# Altium PCB Capstone PCB.PcbDoc
Units mil, origin at the board's own origin, x right, y up, seen from the top; angles counter-clockwise.
Board outline 6965 x 4935 mil, 4 copper layers (Top Layer, AGND, PGND, Bottom Layer), stack 26.468 mil thick; 52 components, 33 nets, 164 pads, 57 vias.
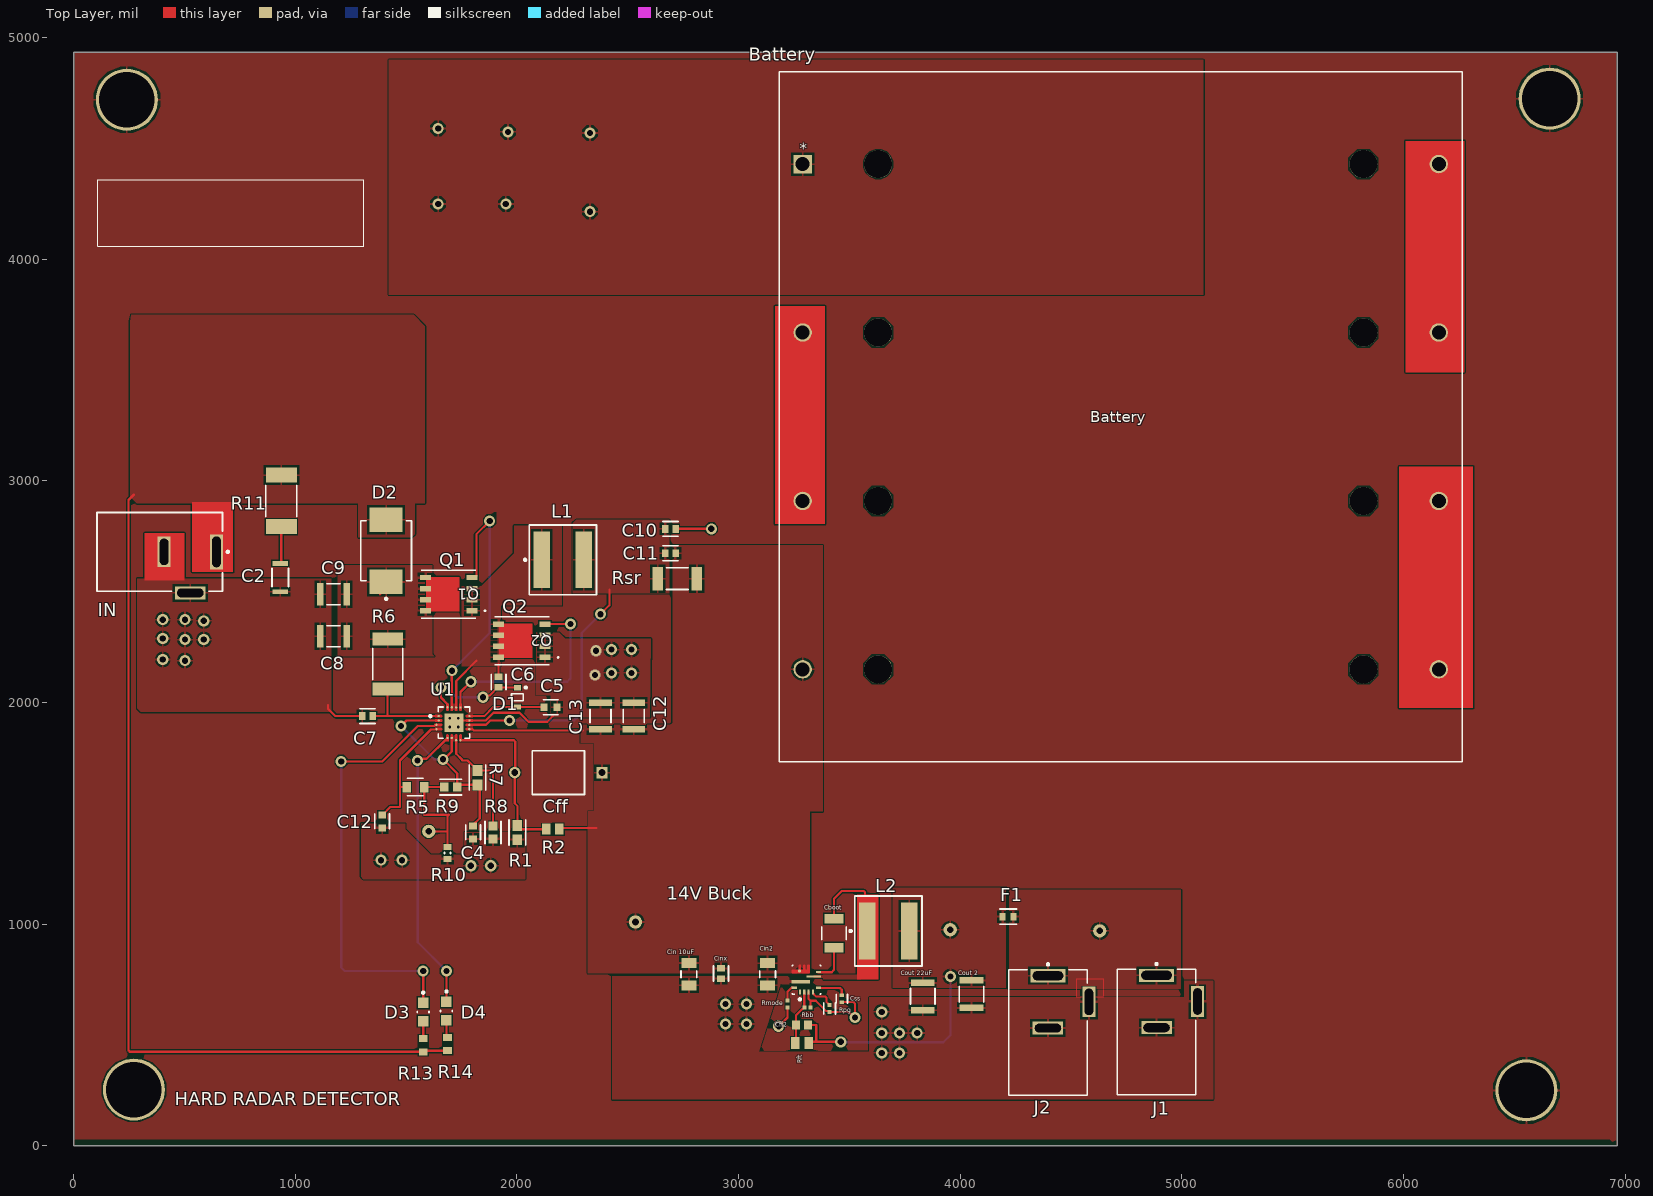
[diagram p0: Top Layer view]
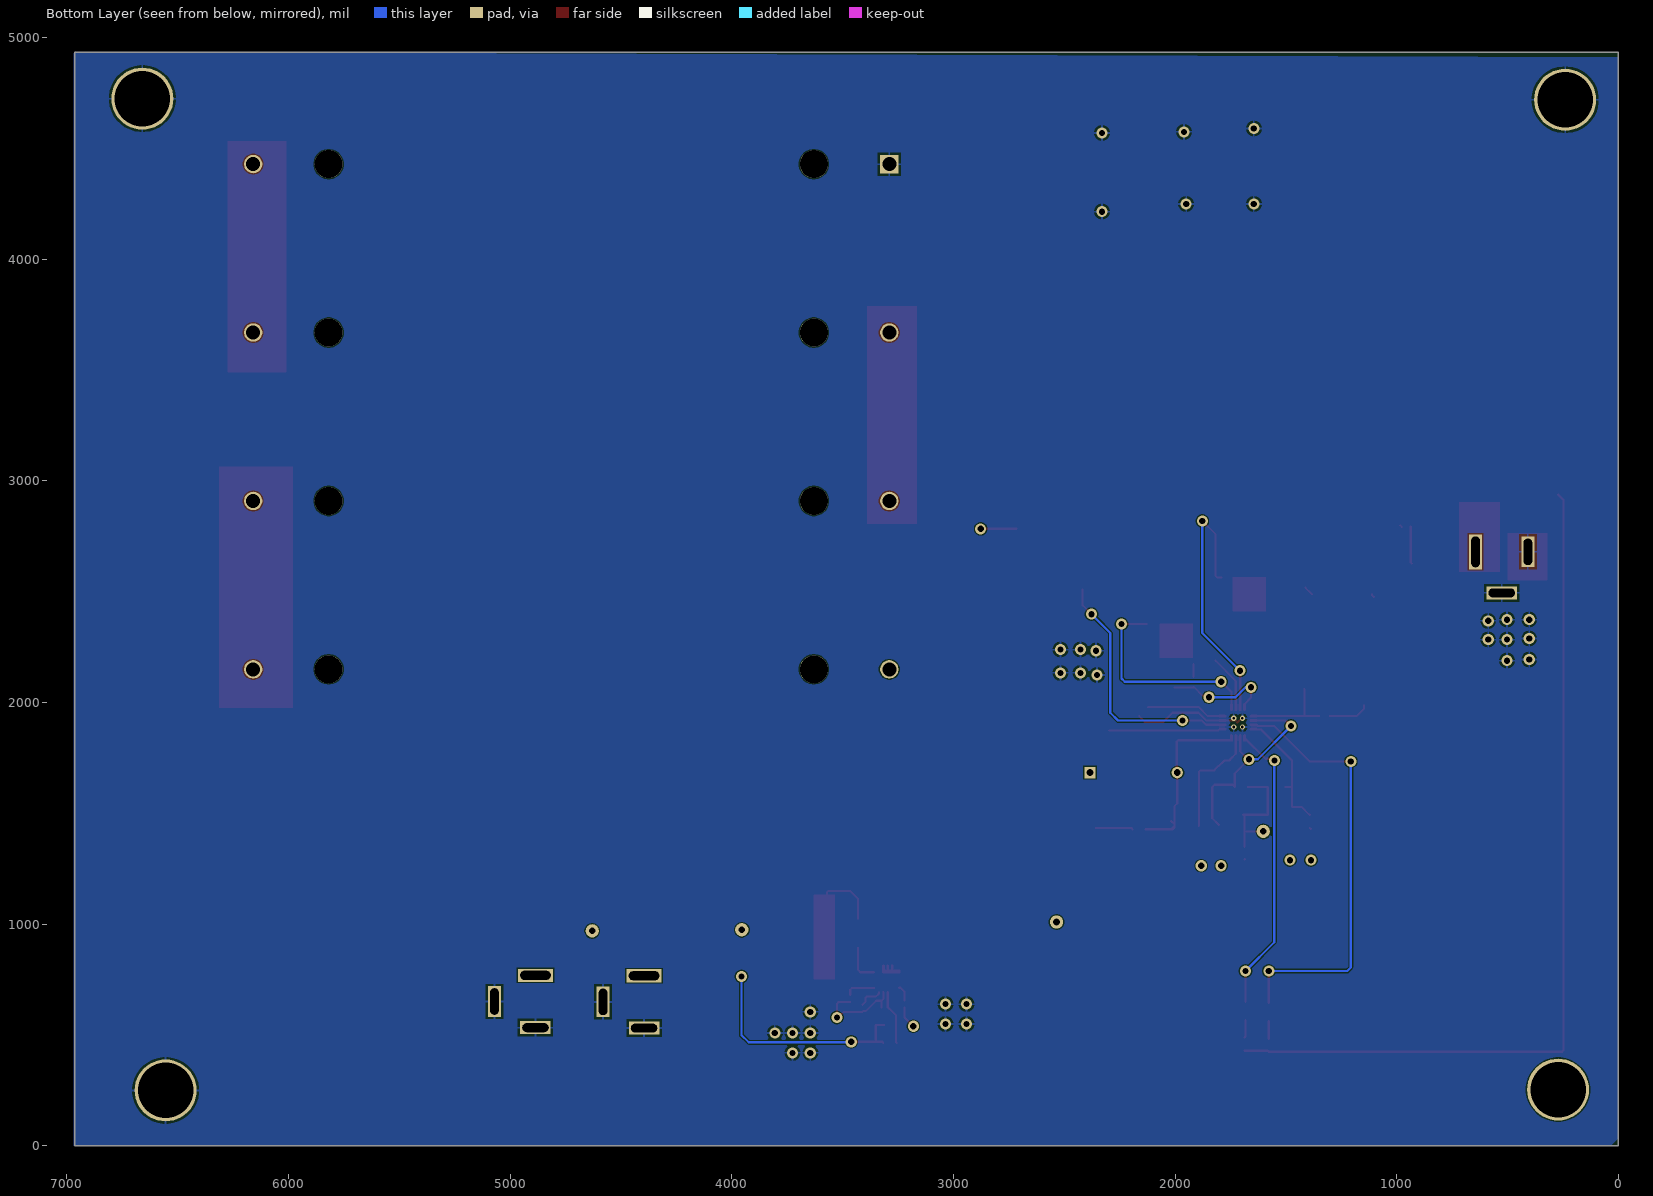
[diagram p1: Bottom Layer view, seen from below]
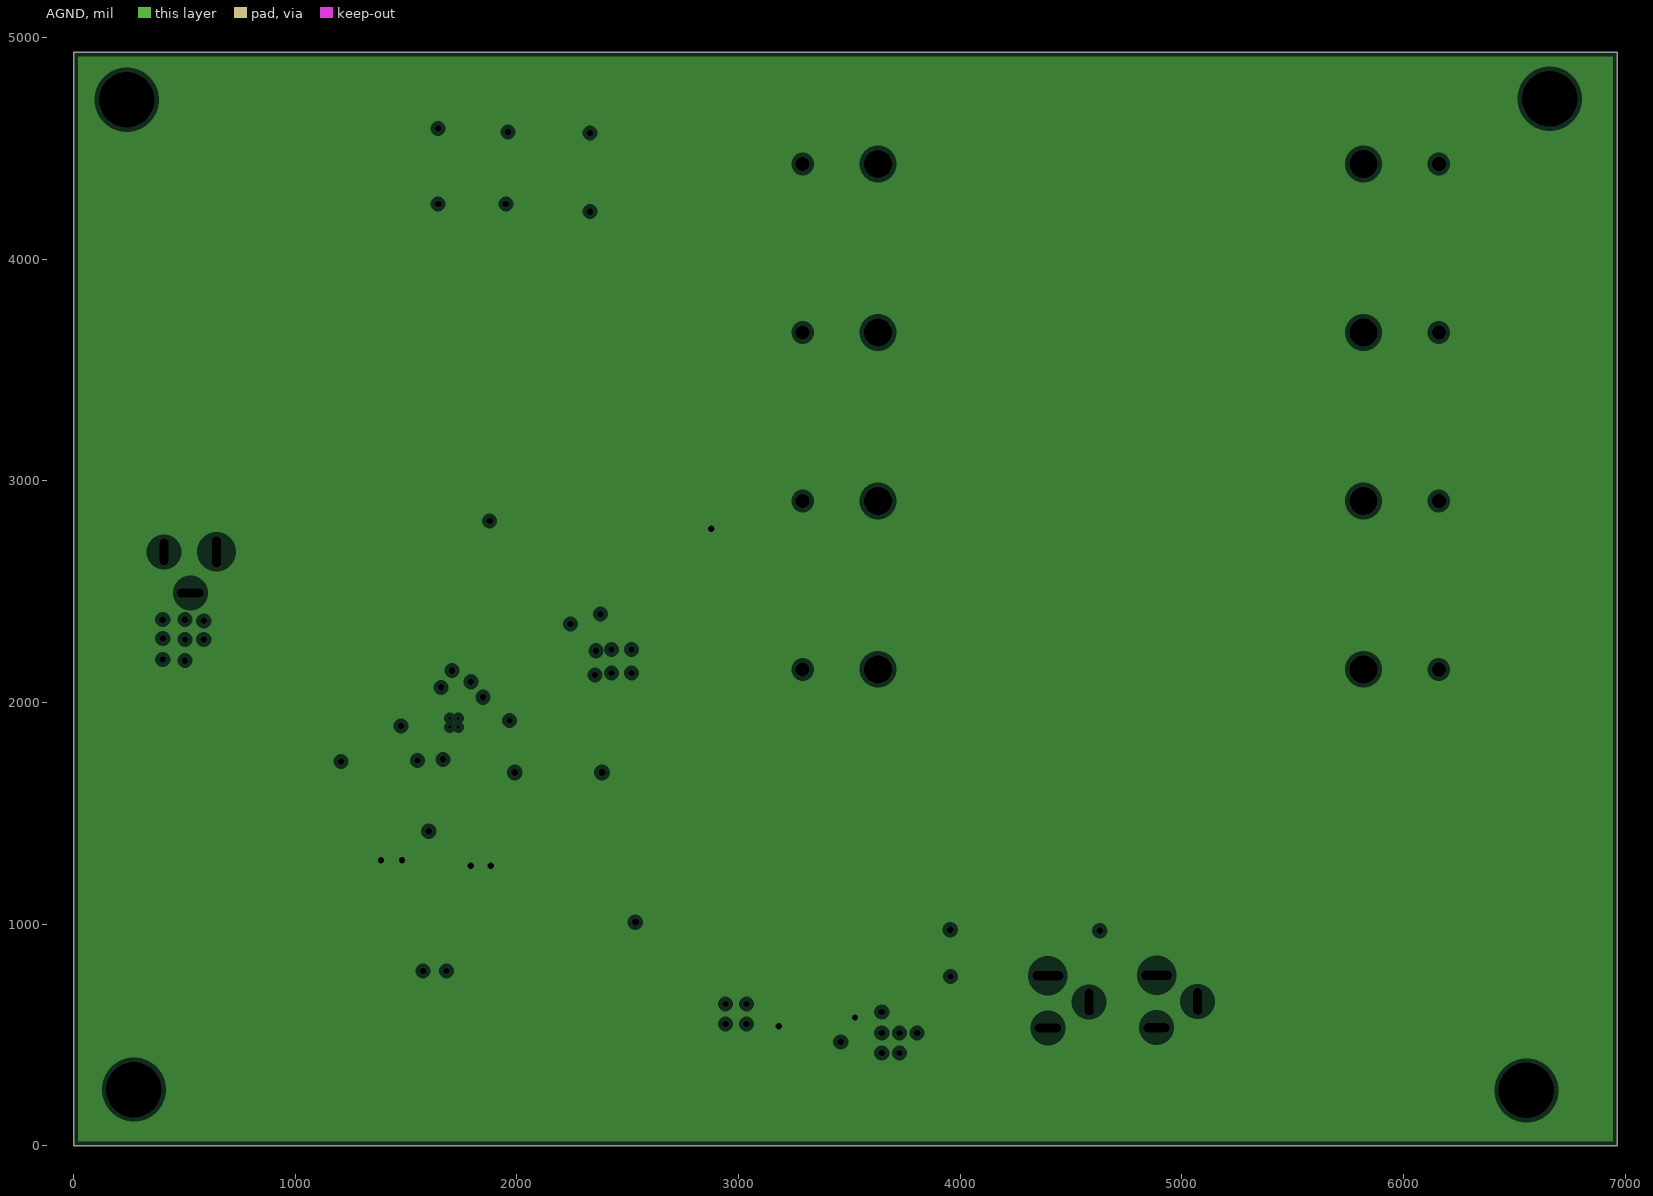
[diagram p2: AGND, clearances drawn from the general rule]
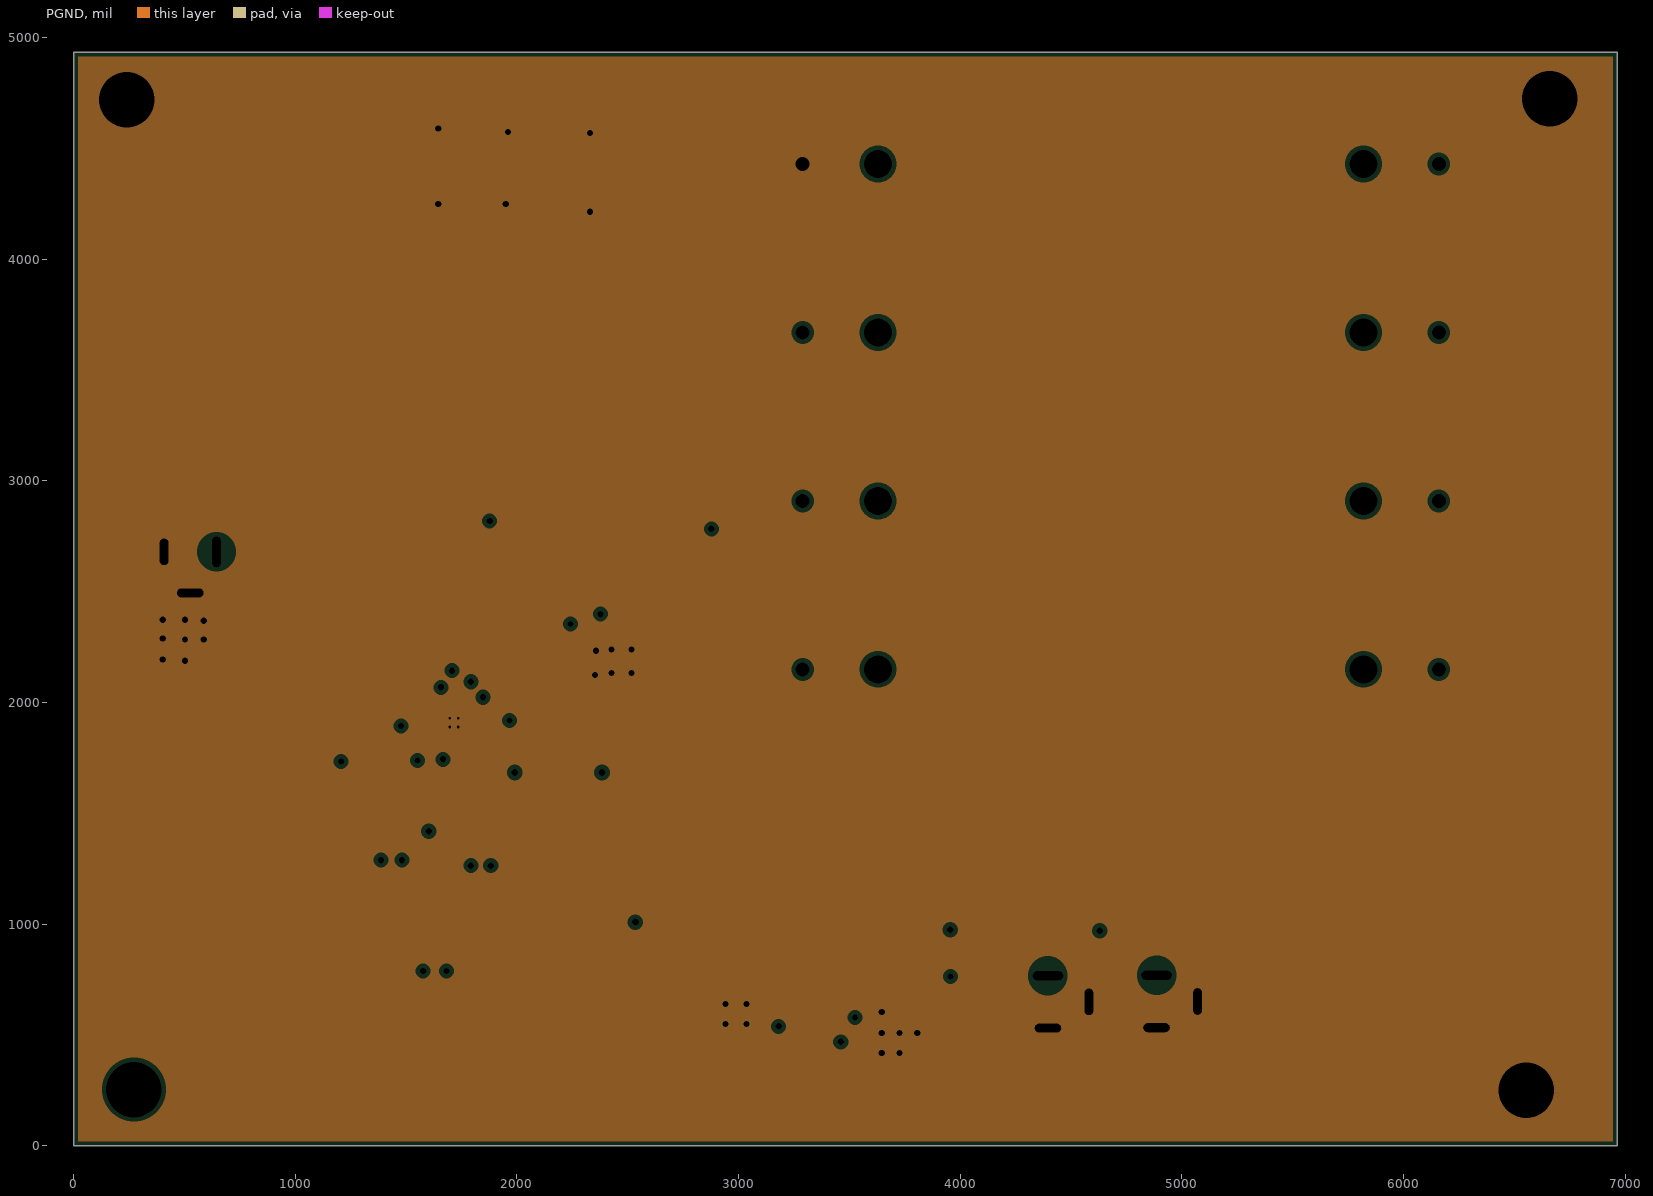
[diagram p3: PGND, clearances drawn from the general rule]
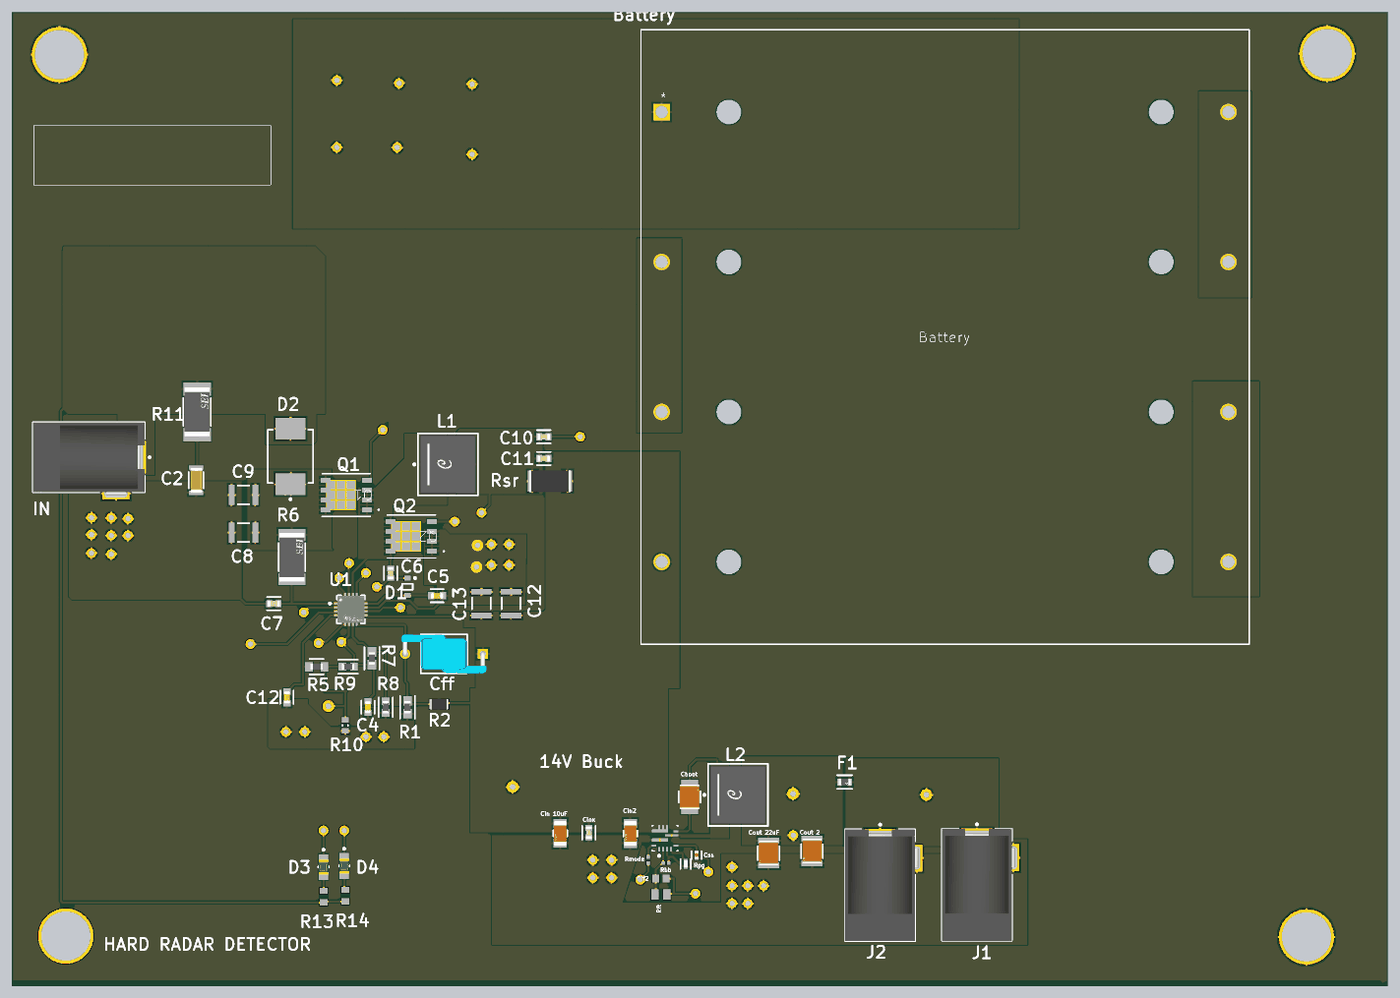
[diagram p4: 3D render of the assembled board from above, using the file's embedded part models]

## Layer stack, top to bottom
Top Solder: solder mask 0.4, Solder Resist, Dk 3.5
Top Layer: signal copper 2.7559
Dielectric 2: prepreg 2.8, PP-006, Dk 4.1
AGND: plane copper 1.378, net SGND
Dielectric 1: dielectric 12.6, FR-4, Dk 4.8
PGND: plane copper 1.378, net GND
Dielectric 3: prepreg 2.8, PP-006, Dk 4.1
Bottom Layer: signal copper 2.7559
Bottom Solder: solder mask 0.4, Solder Resist, Dk 3.5

## Board outline
0,0 0,4935 6965,4935 6965,0

## Design rules (kind name [scope] priority, off if disabled: settings)
Clearance Clearance_2 [All] p1: gap=5 ignorepadtopadclearanceinfootprint=FALSE
Clearance [All] p2: gap=10 ignorepadtopadclearanceinfootprint=FALSE
HoleSize [All] p1: absolutevalues=TRUE maxlimit=200 minlimit=1 maxpercent=80.000 minpercent=20.000
MinimumSolderMaskSliver [All] p1: minsoldermaskwidth=1
PlaneClearance [All] p1: clearance=20
PlaneConnect [All] p1: planeconnectstyle=Relief reliefexpansion=20 reliefentries=4 reliefconductorwidth=10 reliefairgap=10
PolygonConnect [All] p1: connectstyle=Relief reliefconductorwidth=10 reliefentries=4 polygonreliefangle="90 Angle" airgapwidth=10
RoutingVias [All] p1: holewidth=28 width=50 viastyle="Through Hole" minholewidth=28 minwidth=50 maxholewidth=28 maxwidth=50
SilkToSilkClearance [All] p1: silktosilkclearance=1
SilkToSolderMaskClearance [IsPad] p1: minsilkscreentomaskgap=1 clearancetoexposedcopper=TRUE
SolderMaskExpansion [All] p1: expansion=4 istentingtop=FALSE
SupplyNets "Schematic Supply Nets_1" [InNet('SGND')] p1: voltage=0.000
SupplyNets "Schematic Supply Nets" [InNet('GND')] p2: voltage=0.000
Width [All] p1: maxlimit=10 minlimit=1 preferedwidth=10 minimp=50.000000 maximp=50.000000 favimp=50.000000
24 further rules are at their usual default settings.

## Components (designator, comment, footprint, x,y, rotation, side; value= is the part's Value field where it differs from the comment)
"14V Buck" "Comment" RPA0010A-MFG 3306.33,749.62 r90 top
Battery "BK-18650-PC8" BK-18650-PC8_MPD 3289.65,4429.53 r0 top
C2 "CGA5L3X7R1H225K160AB" FP-CGA5L-0_3-0_1-IPC_C 932.29,2564.02 r270 top
C4 "CC0603KRX7R8BB105" FP-CC0603-DA-MFG 1802.29,1414.49 r270 top value="1 uF"
C5 "CC0603KRX7R8BB105" FP-CC0603-DA-MFG 2152.29,1979.02 r0 top value="1 uF"
C6 "C0603C104K4RAC7411" FP-C0603C-CF-MFG 1917.29,2092.64 r90 top value="0.10 μF"
C7 "C0603C104K4RAC7411" FP-C0603C-CF-MFG 1325.91,1939.02 r180 top value="0.10 μF"
C8 "GRM32ER7YA106KA12L" CAPC3225X270X30LL30 1172.29,2299.02 r0 top
C9 "GRM32ER7YA106KA12L" CAPC3225X270X30LL30 1172.29,2489.02 r0 top
C10 "C0603C104K5RACTU" FP-C0603C-CF-MFG 2692.29,2784.02 r180 top value="0.10 μF"
C11 "C0603C104K4RAC7411" FP-C0603C-CF-MFG 2692.29,2674.02 r0 top value="0.10 μF"
C12 "CC0603KRX7R8BB104" FP-CC0603-DA-MFG 1392.29,1464.02 r90 top value="100 nF"
C12 "GRM32ER7YA106KA12L" CAPC3225X270X30LL30 2527.29,1939.02 r90 top
C13 "GRM32ER7YA106KA12L" CAPC3225X270X30LL30 2377.29,1939.02 r90 top
Cboot "C3225X6S1C226M250AC" FP-C3225-250-0_4-MFG 3431.17,959.55 r90 top
Cff "DE11XRB220KN4AR01F" FP-DE1_D6_T5_F10_d0_6-0_0-MFG 2187.29,1684.02 r180 top
Cff2 "C0603C151K3GACTU" CAPC1608X87X35NL15T15 3286.23,545.6 r0 top
Cin2 "Comment" FP-GRM31C-0_2-e0_3_0_8-IPC_C 3131.17,774.28 r270 top
"Cin 10uF" "Comment" FP-GRM31C-0_2-e0_3_0_8-IPC_C 2776.17,774.51 r270 top
Cinx "C0603C104M3VACTU" FP-C0603C-CF-MFG 2921.17,778.13 r270 top value="0.10 μF"
"Cout 2" "Cin" FP-C3225-250-0_4-IPC_C 4051.17,684.51 r270 top
"Cout 22uF" "Cin" FP-C3225-250-0_4-IPC_C 3831.17,674.51 r270 top
Css "GRM155R71C223KA01D" FP-GRM155-0_05-MFG 3466.17,664.51 r270 top
D1 "BAT54HT1G" ONSC-SOD-323-2-477-02_V 2002.29,2024.02 r270 top
D2 "MBRS540T3G" ONSC-SMC-2-403-03_V 1410,2685 r90 top
D3 "LTST-C170GKT" FP-LTST-C170GKT-MFG 1577.29,604.02 r270 top
D4 "LTST-C170GKT" FP-LTST-C170GKT-MFG 1682.29,609.02 r270 top
F1 "FEMTOASMDC005F-2" FP-MCT0603-IPC_C 4216.17,1034.51 r0 top
IN "PJ-002A" CUI-PJ-002A_V 526.48,2680.04 r180 top
J1 "PJ-002A" CUI-PJ-002A_V 4886.17,651.4 r270 top
J2 "PJ-002A" CUI-PJ-002A_V 4396.17,649.51 r270 top
L1 "XAL7070-222" FP-XAL7070-MFG 2207.29,2644.02 r0 top (schematic designator L?)
L2 "XAL7070-332" FP-XAL7070-MFG 3676.05,969.51 r0 top
Q1 "SIR426DP-T1-GE3" POWERPAK_SO-8_SINGLE 1692.29,2489.02 r180 top
Q2 "SIR426DP-T1-GE3" POWERPAK_SO-8_SINGLE 2022.29,2279.02 r180 top
R1 "RR0816P-104-D" FP-RR0816-IPC_A 2002.29,1413.72 r90 top
R2 "ERA-6AEB6983V" RESC2013X60X40LL20T25_A 2162.29,1429.02 r0 top
R5 "RR0816P-101-D" FP-RR0816-MFG 1542.29,1619.02 r180 top
R6 "RMCF2512JT10R0" FP-RMCF2512-IPC_B 1417.29,2174.02 r90 top
R7 "RR0816P-104-D" FP-RR0816-IPC_A 1822.29,1661.51 r270 top
R8 "ERA-3AEB4122V" FP-ERA3A-IPC_B 1892.29,1414.02 r90 top
R9 "ERA-3AEB9311V" FP-ERA3A-IPC_B 1701.83,1619.02 r180 top
R10 "442K 1% 0603(1608)" RESC0603(1608)_L 1687.29,1321.58 r90 top value="442000.00 Ohm"
R11 "RMCF2512JT2R00" FP-RMCF2512-IPC_A 937.29,2910.2 r90 top
R13 "RC0603JR-0710KL" RESC1608X55X25ML10T15 1577.29,454.02 r90 top
R14 "RC0603JR-0710KL" RESC1608X55X25ML10T15 1687.29,459.02 r90 top
Rbb "10K 1% 0201(0603)" RESC0201(0603)_N 3311.17,624.51 r180 top value="100000.00 Ohm"
Rft "ERJ-6ENF7322V" RESC2013X70X40LL20T20 3286.17,464.51 r0 top
Rmode "CRCW040252K3FKED" RESC1005X40X25LL05T05 3221.17,639.51 r90 top
Rpg "CRCW0402100KFKED" FP-CRCW0402-e3-IPC_C 3411.17,619.51 r270 top
Rsr "WSL2010R0100FEA" RESC5125X89X51LL25T25 2723.71,2559.02 r0 top
U1 "BQ24600RVAT" FP-RVA0016A-MFG 1716.19,1909.49 r0 top

## Footprints (in the part's own frame and the unit in brackets; to place one, negate y for a bottom-side part, rotate by r counter-clockwise, add the part's x,y. Pads: shape width x height; smd on the part's side, far side on the other; paste and mask are expansions set on the pad)
BK-18650-PC8_MPD [mil]
  rect 83x83 hole 63 paste-99999 mask+0: 1(0,0)
  round 83 hole 63 paste-99999 mask+0: 2(0,-759.84) 3(0,-1519.68) 4(0,-2279.53) 5(2870.08,-2279.53) 6(2870.08,-1519.69) 7(2870.08,-759.84) 8(2870.08,0)
  round 126 hole 126 unplated paste-99999 mask+0: 9(340.35,0) 10(340.35,-759.84) 11(340.35,-1519.68) 12(340.35,-2279.53) 13(2529.72,-2279.53) 14(2529.72,-1519.69) 15(2529.72,-759.84) 16(2529.72,0)
  silkscreen extent -105,-2697 2975,417
CAPC1608X87X35NL15T15 [mm] "Chip Capacitor, 2-Leads, Body 1.60x0.80mm, IPC Medium Density"
  rect 0.9x1 smd: 1(-0.675,0) 2(0.675,0)
  body extent -0.87,-0.48 0.87,0.47, height 0.87
CAPC3225X270X30LL30 [mm] "Chip Capacitor, 2-Leads, Body 3.5x2.7mm, IPC High Density"
  rect 0.75x2.6 smd: 1(-1.525,0) 2(1.525,0)
  silkscreen extent -0.75,-1.2 0.75,1.2, body extent -1.75,-1.35 1.75,1.35, height 2.7
CUI-PJ-002A_V [mm] "THD, 3-Leads, Body 14.4x9mm, Height 11mm"
  rect 1.5x4 hole 1 slot 3.5 at 90 deg: 1(-3,0)
  rect 1.5x3.5 hole 1 slot 3 at 90 deg: 2(3,0)
  rect 3.5x1.5 hole 1 slot 3 at 0 deg: 3(0,4.7)
  silkscreen extent -4.43,-4.5 10.7,4.5, body extent -3.7,-4.5 10.7,4.9, height 11
FP-C0603C-CF-MFG [mm]
  rect 0.75x0.9 smd paste+0 mask+0: 1(-0.6,0) 2(0.6,0)
  silkscreen extent -0.87,-0.85 0.88,0.85, body extent -1.2,-0.6 1.2,0.6, height 0.25
FP-C3225-250-0_4-IPC_C [mm]
  rect 0.753x2.704 smd paste+0 mask+0: 1(-1.575,0) 2(1.575,0)
  silkscreen extent -0.9,-1.4 0.9,1.4, body extent -2.05,-1.5 2.05,1.5, height 0.25
FP-C3225-250-0_4-MFG [mm]
  rect 1.1x2.2 smd paste+0 mask+0: 1(-1.65,0) 2(1.65,0)
  silkscreen extent -0.72,-1.4 0.72,1.4, body extent -2.3,-1.5 2.3,1.5, height 0.25
FP-CC0603-DA-MFG [mm]
  rect 0.8x0.9 smd paste+0 mask+0: 1(-0.75,0) 2(0.75,0)
  silkscreen extent -0.85,-0.85 0.85,0.85, body extent -1.35,-0.75 1.35,0.75, height 0.25
FP-CGA5L-0_3-0_1-IPC_C [mm]
  rect 0.556x1.806 smd paste+0 mask+0: 1(-1.625,0) 2(1.625,0)
  silkscreen extent -1.05,-0.95 1.05,0.95, body extent -2,-1.05 2,1.05, height 0.25
FP-CRCW0402-e3-IPC_C [mil]
  rect 18.43x18.6 smd paste+0 mask+0: 1(-15.83,0) 2(15.83,0)
  silkscreen extent -25,-27 25,27, body extent -29,-15 29,15, height 10
FP-DE1_D6_T5_F10_d0_6-0_0-MFG [mm]
  rect 1.3x1.3 hole 0.8 paste-2539.97 mask+0: 1(-5,0)
  round 1.3 hole 0.8 paste-2539.97 mask+0: 2(5,0)
  silkscreen extent -3,-2.5 3,2.5, body extent -5.75,-2.6 5.75,2.6, height 0.25
FP-ERA3A-IPC_B [mil]
  rect 39.58x39.61 smd paste+0 mask+0: 1(-29.55,0) 2(29.55,0)
  silkscreen extent -49,-36 49,36, body extent -59,-30 59,30, height 10
FP-GRM31C-0_2-e0_3_0_8-IPC_C [mil]
  rect 45.46x67.17 smd paste+0 mask+0: 1(-50.23,0) 2(50.23,0)
  silkscreen extent -16,-35 16,35, body extent -77,-39 77,39, height 10
FP-GRM155-0_05-MFG [mm]
  rect 0.4x0.5 smd paste+0 mask+0: 1(-0.4,0) 2(0.4,0)
  silkscreen extent -0.5,-0.65 0.5,0.65, body extent -0.7,-0.38 0.7,0.38, height 0.25
FP-LTST-C170GKT-MFG [mm]
  rect 1.2x1.2 smd paste+0 mask+0: 1(-1.05,0) 2(1.05,0)
  silkscreen extent -2.35,-0.67 0.08,0.67, body extent -1.75,-0.77 1.75,0.77, height 0.25
FP-MCT0603-IPC_C [mil]
  rect 26.13x33.94 smd paste+0 mask+0: 1(-24.78,0) 2(24.78,0)
  silkscreen extent -38,-34 38,34, body extent -42,-23 42,23, height 10
FP-RMCF2512-IPC_A [mil]
  rect 67.1x139.96 smd paste+0 mask+0: 1(-116.18,0) 2(116.18,0)
  silkscreen extent -71,-70 71,70, body extent -169,-90 169,90, height 10
FP-RMCF2512-IPC_B [mil]
  rect 59.22x136.02 smd paste+0 mask+0: 1(-112.24,0) 2(112.24,0)
  silkscreen extent -71,-68 71,68, body extent -152,-78 152,78, height 10
FP-RR0816-IPC_A [mil]
  rect 49.41x43.55 smd paste+0 mask+0: 1(-32.51,0) 2(32.51,0)
  silkscreen extent -57,-38 57,38, body extent -77,-41 77,41, height 10
FP-RR0816-MFG [mm]
  rect 1x1.2 smd paste+0 mask+0: 1(-1,0) 2(1,0)
  silkscreen extent -0.9,-1 0.9,1, body extent -1.6,-0.7 1.6,0.7, height 0.25
FP-RVA0016A-MFG [mm]
  round 0.252 smd paste-1000 mask+0: 1(-1.75,0.75) 2(-1.75,0.25) 3(-2.01,-0.25) 4(-2.01,-0.75) 5(-0.75,-1.75) 6(-0.25,-1.75) 7(0.25,-2.01) 8(0.75,-2.01) 9(1.75,-0.75) 10(1.75,-0.25) 11(1.764,0.25) 12(1.764,0.75) 13(0.75,1.75) 14(0.25,1.75) 15(-0.25,1.764) 16(-0.75,1.764)
  rect 2.14x2.14 smd paste-1000 mask+0: 17(0,0)
  Top Layer region: 2.15,0.11 1.49,0.11 1.436,0.121 1.391,0.151 1.361,0.196 1.35,0.25 1.35,0.25 1.361,0.304 1.391,0.349 1.436,0.379 1.49,0.39 1.49,0.39 2.15,0.39
  Top Layer region: 2.15,-0.89 1.49,-0.89 1.436,-0.879 1.391,-0.849 1.361,-0.804 1.35,-0.75 1.35,-0.75 1.361,-0.696 1.391,-0.651 1.436,-0.621 1.49,-0.61 1.49,-0.61 2.15,-0.61
  Top Layer region: -2.15,0.89 -1.49,0.89 -1.436,0.879 -1.391,0.849 -1.361,0.804 -1.35,0.75 -1.35,0.75 -1.361,0.696 -1.391,0.651 -1.436,0.621 -1.49,0.61 -1.49,0.61 -2.15,0.61
  Top Layer region: -2.15,0.39 -1.49,0.39 -1.436,0.379 -1.391,0.349 -1.361,0.304 -1.35,0.25 -1.35,0.25 -1.361,0.196 -1.391,0.151 -1.436,0.121 -1.49,0.11 -1.49,0.11 -2.15,0.11
  Top Layer region: -2.15,-0.11 -1.49,-0.11 -1.436,-0.121 -1.391,-0.151 -1.361,-0.196 -1.35,-0.25 -1.35,-0.25 -1.361,-0.304 -1.391,-0.349 -1.436,-0.379 -1.49,-0.39 -1.49,-0.39 -2.15,-0.39
  Top Layer region: -2.15,-0.61 -1.49,-0.61 -1.436,-0.621 -1.391,-0.651 -1.361,-0.696 -1.35,-0.75 -1.35,-0.75 -1.361,-0.804 -1.391,-0.849 -1.436,-0.879 -1.49,-0.89 -1.49,-0.89 -2.15,-0.89
  Top Layer region: -0.89,-2.15 -0.89,-1.49 -0.879,-1.436 -0.849,-1.391 -0.804,-1.361 -0.75,-1.35 -0.75,-1.35 -0.696,-1.361 -0.651,-1.391 -0.621,-1.436 -0.61,-1.49 -0.61,-1.49 -0.61,-2.15
  Top Layer region: -0.39,-2.15 -0.39,-1.49 -0.379,-1.436 -0.349,-1.391 -0.304,-1.361 -0.25,-1.35 -0.25,-1.35 -0.196,-1.361 -0.151,-1.391 -0.121,-1.436 -0.11,-1.49 -0.11,-1.49 -0.11,-2.15
  Top Layer region: 0.11,-2.15 0.11,-1.49 0.121,-1.436 0.151,-1.391 0.196,-1.361 0.25,-1.35 0.25,-1.35 0.304,-1.361 0.349,-1.391 0.379,-1.436 0.39,-1.49 0.39,-1.49 0.39,-2.15
  Top Layer region: 0.61,-2.15 0.61,-1.49 0.621,-1.436 0.651,-1.391 0.696,-1.361 0.75,-1.35 0.75,-1.35 0.804,-1.361 0.849,-1.391 0.879,-1.436 0.89,-1.49 0.89,-1.49 0.89,-2.15
  Top Layer region: 2.15,-0.39 1.49,-0.39 1.436,-0.379 1.391,-0.349 1.361,-0.304 1.35,-0.25 1.35,-0.25 1.361,-0.196 1.391,-0.151 1.436,-0.121 1.49,-0.11 1.49,-0.11 2.15,-0.11
  Top Layer region: 2.15,0.61 1.49,0.61 1.436,0.621 1.391,0.651 1.361,0.696 1.35,0.75 1.35,0.75 1.361,0.804 1.391,0.849 1.436,0.879 1.49,0.89 1.49,0.89 2.15,0.89
  Top Layer region: 0.89,2.15 0.89,1.49 0.879,1.436 0.849,1.391 0.804,1.361 0.75,1.35 0.75,1.35 0.696,1.361 0.651,1.391 0.621,1.436 0.61,1.49 0.61,1.49 0.61,2.15
  Top Layer region: 0.39,2.15 0.39,1.49 0.379,1.436 0.349,1.391 0.304,1.361 0.25,1.35 0.25,1.35 0.196,1.361 0.151,1.391 0.121,1.436 0.11,1.49 0.11,1.49 0.11,2.15
  Top Layer region: -0.11,2.15 -0.11,1.49 -0.121,1.436 -0.151,1.391 -0.196,1.361 -0.25,1.35 -0.25,1.35 -0.304,1.361 -0.349,1.391 -0.379,1.436 -0.39,1.49 -0.39,1.49 -0.39,2.15
  Top Layer region: -0.61,2.15 -0.61,1.49 -0.621,1.436 -0.651,1.391 -0.696,1.361 -0.75,1.35 -0.75,1.35 -0.804,1.361 -0.849,1.391 -0.879,1.436 -0.89,1.49 -0.89,1.49 -0.89,2.15
  silkscreen extent -2.82,-1.8 1.8,1.8, body extent -2.25,-2.25 2.25,2.25, height 0.25
FP-XAL7070-MFG [mm]
  rect 1.92x6.5 smd paste+0 mask+0: 1(-2.41,0) 2(2.41,0)
  silkscreen extent -4.45,-4 3.85,4, body extent -3.95,-4.1 3.95,4.1, height 0.25
ONSC-SMC-2-403-03_V [mil] "Molded, 2-Leads, Body 6.86x5.84mm"
  rect 110x150 smd: 1(-140.49,0) 2(140.49,0)
  silkscreen extent -222,-115 135,115, body extent -135,-115 135,115, height 99
ONSC-SOD-323-2-477-02_V [mm] "SOD, 2-Leads, Body 1.7x1.25mm"
  rect 0.63x0.83 smd: 1(-1.115,0) 2(1.115,0)
  silkscreen extent -1.24,-0.67 0.4,1.09, body extent -0.85,-0.63 0.85,0.63, height 1.06
POWERPAK_SO-8_SINGLE [mil]
  rect 50x24 smd paste-24.5 mask-25: 1(-105,75) 2(-105,25) 3(-105,-25) 4(-105,-75) 5(105,-75) 6(105,-25) 7(105,25) 8(105,75)
  Top Layer region: -48,-77 -48,77 102,77 102,-77
  silkscreen extent -167,-109 123,109
RESC0201(0603)_N [mm] "Chip Resistor, Body 0.6x0.3mm, IPC Medium Density"
  rect 0.45x0.45 smd: 1(-0.35,0) 2(0.35,0)
  body extent -0.31,-0.16 0.31,0.16, height 0.3
RESC0603(1608)_L [mm] "Chip Resistor, Body 1.6x0.8mm, IPC High Density"
  rect 0.7x0.9 smd: 1(-0.7,0) 2(0.7,0)
  silkscreen extent -0.05,-0.35 0.05,0.35, body extent -0.85,-0.47 0.85,0.47, height 0.6
RESC1005X40X25LL05T05 [mm] "Chip Resistor, 2-Leads, Body 1.00x0.50mm, IPC High Density"
  rect 0.45x0.45 smd: 1(-0.4,0) 2(0.4,0)
  body extent -0.53,-0.27 0.53,0.28, height 0.4
RESC1608X55X25ML10T15 [mm] "Chip Resistor, 2-Leads, Body 1.60x0.80mm, IPC Low Density"
  rect 0.8x1 smd: 1(-0.75,0) 2(0.75,0)
  body extent -0.85,-0.45 0.85,0.45, height 0.55
RESC2013X60X40LL20T25_A [mm] "Chip Resistor, 2-Leads, Body 2.20x1.35mm, IPC High Density"
  rect 1x1.25 smd: 1(-0.75,0) 2(0.75,0)
  body extent -1.1,-0.67 1.1,0.67, height 0.6
RESC2013X70X40LL20T20 [mm] "Chip Resistor, 2-Leads, Body 2.00x1.25mm, IPC High Density"
  rect 0.95x1.35 smd: 1(-0.775,0) 2(0.775,0)
  body extent -1.1,-0.72 1.1,0.72, height 0.7
RESC5125X89X51LL25T25 [mm] "Chip Resistor, 2-Leads, Body 5.33x2.79mm, IPC High Density"
  rect 1.2x2.7 smd: 1(-2.25,0) 2(2.25,0)
  silkscreen extent -1.25,-1.25 1.25,1.25, body extent -2.67,-1.4 2.67,1.4, height 0.89
RPA0010A-MFG [mm]
  rect 0.6x0.25 smd paste+0 mask+0: 1(-1.4,0.75) 2(-1.4,0.25) 3(-1.4,-0.25) 4(-1.4,-0.75)
  rect 0.25x0.6 smd paste+0 mask+0: 5(-0.93,-1.4) 7(0.87,-1.4) 10(-0.93,1.4)
  rect 0.25x1.7 smd paste-0.837 mask+0: 6(0.37,-0.85)
  round 0.35 smd paste+0 mask+0: 8(0.99,0.8)
  rect 0.4x2.1 smd paste-1.037 mask+0: 9(-0.21,0.65)
  Top Layer region: 1.1,1.7 0.8,1.7 0.75,1.65 0.75,-0.35 0.8,-0.4 1.15,-0.4 1.15,-0.375 1.66,-0.375 1.71,-0.325 1.71,-0.175 1.66,-0.125 1.15,-0.125 1.15,0.125 1.66,0.125 1.71,0.175 1.71,0.325 1.66,0.375 1.15,0.375 1.15,0.625 1.66,0.625 1.71,0.675 1.71,0.825 1.66,0.875 1.2,0.875 1.15,0.925 1.15,1.65
  silkscreen extent -2.37,-1.66 1.65,1.65

## Part data
"14V Buck": library part TPS56A37RPAR, "4.5V to 28V input, 10A synchronous buck converter 10-VQFN-HR -40 to 150", Manufacturer_Name="Texas Instruments", Copyright="Copyright (C) 2025 Ultra Librarian. All rights reserved.", Manufacturer_Part_Number=TPS56A37RPAR, RefDes=RefDes, TYPE=TYPE
Battery: "No Description Available", Manufacturer_Name="Memory Protection Devices", VALUE_2=Value, Copyright="Copyright (C) 2026 Ultra Librarian. All rights reserved.", Manufacturer_Part_Number=BK-18650-PC8
C2: library part CMP-08246-002495-1, "Cap Ceramic 2.2uF 50V X7R 10% Pad SMD 1206 +125°C Automotive T/R", Capacitance=2.2uF, Case Code (Imperial)=1206, Case Code (Metric)=3216, Dielectric=X7R, Max Operating Temperature=125°C, Min Operating Temperature=-55°C, Package Quantity=1, Ratings=AEC-Q200, Tolerance=10%, Voltage Rating=50V, Case/Package=1206, Composition=Ceramic, Depth=1.6mm, Height=1.6mm, Length=3.2mm, Mount="Surface Mount", Packaging="Tape and Reel", REACH SVHC="No SVHC", Termination=SMD/SMT, Thickness=0.075inch, Voltage Rating (DC)=50V, Weight=0.000571oz, Width=0.063inch
C4 C5: library part CMP-2100-03598-2, "CAP CER 1UF 25V X7R 0603", Capacitance="1 uF", Manufacturer=YAGEO, Package=CC0603-DA, Temperature="-55°C to +125°C", Temperature Characteristic=X7R, Temperature Coefficient=15%, Temperature Range High=+125°C, Temperature Range Low=-55°C, Tolerance=0.1, Voltage="25 V", Automotive=No, Category=Cap, ComponentLink2Description=Datasheet, ComponentLink2URL=http://www.yageo.com/documents/recent/UPY-GPHC_X7R_6.3V-to-50V_18.pdf, Device Class L1="Passive Components", Device Class L2=Capacitors, Device Class L3="Ceramic Capacitors", Digikey Description="CAP CER 1UF 25V X7R 0603", Footprint Url=http://www.yageo.com/exep/pages/download/literatures/UPY-C_GEN_24.pdf, Height=0.9mm, Lead Free=Yes, Manufacturer Part Number=CC0603KRX7R8BB105, Material=Ceramic, Mouser Description="0603 1 uF 25 V ±10% Tolerance X7R SMT Multilayer Ceramic Capacitor", Octopart=https://octopart.com/cc0603krx7r8bb105-yageo-24490981, RoHS=TRUE, Voltage Rating="25 V"
C6 C7 C11: library part CMP-2006-03724-3, "CAP CER 0.1UF 16V X7R 0603", Capacitance="0.10 μF", Manufacturer=KEMET, Package=C0603C-CF, Temperature="-55°C to +125°C", Temperature Characteristic=X7R, Temperature Coefficient=30ppm/°C, Temperature Range High=+125°C, Temperature Range Low=-55°C, Tolerance=0.1, Voltage Rating="16 V", Automotive=Yes, Automotive Grade="Grade 1", Category=Cap, ComponentLink2Description=Datasheet, ComponentLink2URL=https://api.kemet.com/component-edge/download/datasheet/C0603C100J5GACAUTO.pdf, Device Class L1="Passive Components", Device Class L2=Capacitors, Device Class L3="Ceramic Capacitors", Digikey Description="CAP CER 0.1UF 16V X7R 0603", Height=0.87mm, Lead Free=Yes, Manufacturer Part Number=C0603C104K4RAC7411, Material=Ceramic, Mouser Description="Cap Ceramic 0.1uF 16V X7R 10% SMD 0603 125°C Paper T/R", Octopart=https://octopart.com/c0603c104k4rac7411-kemet-3919501, RoHS=TRUE
C8 C9 C12 C13: library part CMP-1038-02234-2, "Chip Capacitor, 10 uF, +/- 10%, 35 V, -55 to 125 degC, 1210 (3225 Metric), RoHS, Tape and Reel", Capacitance=10µF, Capacitance tolerance=±10%, Manufacturer=Murata, Package Description="2-Pin Surface Mount Device, Body 3.2 x 2.5 mm", Package Reference=1210, Rated voltage=35VDC, Ceramic type=X7R, Construction form=1210, Datasheet URL=https://datasheet.ciiva.com/3777/grm32er7ya106ka1223-3777248.pdf, Datasheet Version=11/2014, Manufacturer URL=http://www.murata.com/, Mounting Technology=SurfaceMount
C10: library part CMP-2006-03061-2, "CAP CER 0.1UF 50V X7R 0603", Capacitance="0.10 μF", Manufacturer=KEMET, Package=C0603C-CF, Temperature="-55°C to +125°C", Temperature Characteristic=X7R, Temperature Coefficient=30ppm/°C, Temperature Range High=+125°C, Temperature Range Low=-55°C, Tolerance=0.1, Voltage Rating="50 V", Automotive=Yes, Automotive Grade="Grade 1", Category=Cap, ComponentLink2Description=Datasheet, ComponentLink2URL=https://api.kemet.com/component-edge/download/datasheet/C0603C100J5GACAUTO.pdf, Device Class L1="Passive Components", Device Class L2=Capacitors, Device Class L3="Ceramic Capacitors", Digikey Description="CAP CER 0.1UF 50V X7R 0603", Height=0.87mm, Lead Free=Yes, Manufacturer Part Number=C0603C104K5RACTU, Material=Ceramic, Octopart=https://octopart.com/c0603c104k5ractu-kemet-139244, RoHS=TRUE
C12: library part CMP-03422-000234-1, "CAP CER 0.1UF 25V X7R 0603", Capacitance="100 nF", Manufacturer=YAGEO, Package=CC0603-DA, Temperature="-55°C to +125°C", Temperature Characteristic=X7R, Temperature Coefficient=15%, Temperature Range High=+125°C, Temperature Range Low=-55°C, Tolerance=0.1, Voltage="25 V", Automotive=No, Category=Cap, ComponentLink2Description=Datasheet, ComponentLink2URL=http://www.yageo.com/documents/recent/UPY-GPHC_X7R_6.3V-to-50V_18.pdf, Device Class L1="Passive Components", Device Class L2=Capacitors, Device Class L3="Ceramic Capacitors", Digikey Description="CAP CER 0.1UF 25V X7R 0603", Footprint Url=http://www.yageo.com/exep/pages/download/literatures/UPY-C_GEN_24.pdf, Height=0.9mm, Lead Free=Yes, Manufacturer Part Number=CC0603KRX7R8BB104, Material=Ceramic, Mouser Description="CC Series 0603 0.1 uF 25 V ±10% Tolerance X7R SMT Multilayer Ceramic Capacitor", Octopart=https://octopart.com/cc0603krx7r8bb104-yageo-8376534, RoHS=TRUE, Voltage Rating="25 V"
Cboot "Cout 2" "Cout 22uF": library part CMP-08246-006992-1, "Multilayer Ceramic Capacitors 22uF ±20% 16V X6S SMD 1210", Capacitance=22uF, Case Code (Imperial)=1210, Case Code (Metric)=3225, Dielectric Material=Ceramic, Max Operating Temperature=105°C, Min Operating Temperature=-55°C, Package Quantity=1000, Tolerance=20%, Voltage Rating=16V, Case/Package=1210, Lead Free="Lead Free", Length=0.126inch, Mount="Surface Mount", Packaging="Tape and Reel", RoHS Compliant=Yes, Series=C, Thickness=0.11inch, Voltage Rating (DC)=16V, Width=0.098inch
Cff: library part CMP-06035-012369-1, "Cap Ceramic Disc 22pF 10% 500VAC Thru-Hole 6.0x5.0x10.0 Ammo pack"
Cff2: library part CMP-2006-03084-1, Manufacturer=Kemet, Part Number=C0603C151K3GACTU
Cin2 "Cin 10uF": library part CMP-06035-003589-1, "Chip Multilayer Ceramic Capacitors for General Purpose, 1206, 10uF, X7R, 15%, 10%, 25V", Capacitance=10uF, Case Code (Imperial)=1206, Case Code (Metric)=3216, Dielectric=X7R, Max Operating Temperature=125°C, Min Operating Temperature=-55°C, Package Quantity=1, Tolerance=10%, Voltage=25V, Case/Package=1206, Depth=1.6mm, Height=1.6mm, Lead Free="Lead Free", Length=3.2mm, Material=Ceramic, Mount="Surface Mount", Number of Pins=2, Packaging="Tape and Reel", Radiation Hardening=No, REACH SVHC="No SVHC", Termination=SMD/SMT, Thickness=0.071inch, Voltage Rating=25V, Voltage Rating (DC)=25V, Width=1.6mm
Cinx: library part CMP-2006-03066-2, "CAP CER 0.1UF 25V Y5V 0603", Capacitance="0.10 μF", Manufacturer=KEMET, Package=C0603C-CF, Temperature="-55°C to +125°C", Temperature Characteristic=Y5V, Temperature Coefficient=30ppm/°C, Temperature Range High=+125°C, Temperature Range Low=-55°C, Tolerance=0.2, Voltage Rating="25 V", Automotive=Yes, Automotive Grade="Grade 1", Category=Cap, ComponentLink2Description=Datasheet, ComponentLink2URL=https://api.kemet.com/component-edge/download/datasheet/C0603C100J5GACAUTO.pdf, Device Class L1="Passive Components", Device Class L2=Capacitors, Device Class L3="Ceramic Capacitors", Digikey Description="CAP CER 0.1UF 25V Y5V 0603", Height=0.87mm, Lead Free=Yes, Manufacturer Part Number=C0603C104M3VACTU, Material=Ceramic, Mouser Description="Multilayer Ceramic Capacitors MLCC - SMD/SMT 25volts 0.1uF Y5V 20%", Octopart=https://octopart.com/c0603c104m3vactu-kemet-149363, RoHS=TRUE
Css: library part CMP-1034-01948-3, "Chip Multilayer Ceramic Capacitors for General Purpose, 0402, 22000pF, X7R, 15%, 10%, 16V", Capacitance=22nF, Case Code (Imperial)=0402, Case Code (Metric)=1005, Dielectric=X7R, Max Operating Temperature=125°C, Min Operating Temperature=-55°C, Package Quantity=10000, Tolerance=10%, Voltage=16V, Case/Package=0402, Depth=0.5mm, Height=0.5mm, Lead Free="Lead Free", Length=1mm, Material=Ceramic, Mount="Surface Mount", Number of Pins=2, Packaging="Tape and Reel", Radiation Hardening=No, REACH SVHC="No SVHC", Termination=SMD/SMT, Thickness=0.022inch, Voltage Rating=16V, Voltage Rating (DC)=16V, Weight=2.3E-05oz, Width=0.02inch
D1: library part CMP-1055-00462-1, "Schottky Barrier Diode, 2-Pin SOD-323, Pb-Free, Tape and Reel", Manufacturer="On Semiconductor", ComponentLink1Description="Manufacturer URL", ComponentLink1URL=http://www.onsemi.com/, ComponentLink2Description=Datasheet, ComponentLink2URL=http://www.onsemi.cn/pub_link/Collateral/BAT54HT1-D.PDF, ComponentLink3Description="Package Specification", ComponentLink3URL=http://www.onsemi.com/pub_link/Collateral/477-02.PDF.1, Configuration=Single, DatasheetVersion="Rev. 6", IFSM Max (A)=0.6, Mounting Technology="Surface Mount", PackageDescription="2-Pin SOD, Body 1.7 x 1.25 mm", PackageReference=SOD-323-2-477-02, PackageVersion="Rev. H, 03/2007", Packing="Tape and Reel", PartNumber=BAT54HT1G, RoHS=TRUE, trr Max (ns)=5
D2: library part CMP-1055-00390-1, "Schottky Power Rectifier, 2-Pin SMC, Pb-Free, Tape and Reel", Manufacturer="On Semiconductor", ComponentLink1Description="Manufacturer URL", ComponentLink1URL=http://www.onsemi.com/, ComponentLink2Description=Datasheet, ComponentLink2URL=http://www.onsemi.cn/pub_link/Collateral/MBRS540T3-D.PDF, ComponentLink3Description="Package Specification", ComponentLink3URL=http://www.onsemi.com/pub_link/Collateral/403-03.PDF, Configuration=Single, DatasheetVersion="Rev. 8", IFSM Max (A)=190, Mounting Technology="Surface Mount", PackageDescription="2-Pin Small Molded Package, J-Bend Lead, Body 5.845 x 6.855 mm", PackageReference=SMC-2-403-03, PackageVersion="Rev. E, 08/2005", Packing="Tape and Reel", PartNumber=MBRS540T3G, RoHS=TRUE
D3 D4: library part CMP-1674-00002-6, "LED GREEN CLEAR SMD", Case Code (Imperial)=0805, Case Code (Metric)=2012, Color=Green, Forward Current=30mA, Forward Voltage=2.1V, Lens Color=Colorless, Max Operating Temperature=85°C, Min Operating Temperature=-55°C, Package Quantity=1, Power Dissipation=100mW, Reverse Voltage=5V, Test Current=10mA, Case/Package=0805, Depth=1.25mm, Dominant Wavelength=569nm, Height=1.1mm, Illumination Color=Green, Lead Free="Lead Free", Length=2mm, Lens Style=Diffused, Lens Transparency=Clear, Luminous Intensity=6mcd, Mount="Surface Mount", Number of Elements=1, Number of LEDs=1, Number of Pins=2, Packaging="Tape and Reel", Power Rating=100mW, Radiation Hardening=No, Viewing Angle=130°, Voltage=5V, Wavelength=565nm, Width=1.25mm
F1: library part CMP-02407-009727-1, "fuse 0603", Case Code (Imperial)=0603, Case Code (Metric)=1608, Max Operating Temperature=155°C, Min Operating Temperature=-55°C, Power Rating=125mW, Resistance=4.99kR, Tolerance=0.1%, Voltage Rating=75V, Case/Package=0603, Composition="Thin Film", Height=0.45mm, Length=1.55mm, Packaging="Tape and Reel", Weight=6.7E-05oz, Width=0.85mm
IN J1 J2: library part CMP-2000-06895-2, "Through Hole Right Angle DC Power Jack, 2.5 A, 2 mm Center Pin, 3 Position, -25 to 85 degC, RoHS, Bulk", Current Rating=2.5A, Flammability Rating=UL94V-0, Insulation Resistance=50MOhms, Manufacturer=CUIInc., Operating Temperature Range=-25Cto+85C, Package Description="3-Pin Through Hole Device, Body 14.4 x 9 mm, Height 11 mm", Voltage Rating=24V, Brand=CUI, Connector Type=DCPowerJack, Contact Gender=Male, Contact Material=Copper, Contact Plating=Nickel, Datasheet URL=http://www.cui.com/product/resource/pj-002a.pdf, Datasheet Version="Rev. 1.03, 04/2016", Factory Pack Quantity=500, Housing Material=PolybutyleneTerephthalate(PBT), Inside Contact Diameter=2mm, Manufacturer URL=http://www.cui.com/, Mounting Angle=Right, Mounting Style=ThroughHole, Mounting Technology=ThroughHole, Outside Contact Diameter=6.5mm, Package Reference=PJ-002A, Product=Jacks, Product Category=DCPowerConnectors, RoHS=True, Termination Style=ThroughHole
L1: library part CMP-11268-000195-1, "Fixed Inductors 2.2uH Shld 20% 25A 2.81mOhms AECQ2", Case/Package=SMD/SMT, DC Resistance (DCR)=2.81mR, Inductance=1uH, Inductance Tolerance=20%, Max DC Current=25A, Max Operating Temperature=125°C, Min Operating Temperature=-40°C, Package Quantity=150, Saturation Current=34.8A, Self Resonant Frequency=64MHz, Test Frequency=100kHz, Core Material=Composite, Height=7mm, Lead Free="Contains Lead", Length=8mm, Mount="Surface Mount", Packaging="Tape and Reel", REACH SVHC="No SVHC", RMS Current (Irms)=25A, RoHS Compliant=Yes, Series=XAL7070, Shielding=Shielded, Termination=SMD/SMT, Tolerance=20%, Width=7.7mm
L2: library part CMP-11268-000195-1, "Fixed Inductors 3.3uH Shld 20% 25A 2.81mOhms AECQ2", Case/Package=SMD/SMT, DC Resistance (DCR)=2.81mR, Inductance=1uH, Inductance Tolerance=20%, Max DC Current=25A, Max Operating Temperature=125°C, Min Operating Temperature=-40°C, Package Quantity=150, Saturation Current=34.8A, Self Resonant Frequency=64MHz, Test Frequency=100kHz, Core Material=Composite, Height=7mm, Lead Free="Contains Lead", Length=8mm, Mount="Surface Mount", Packaging="Tape and Reel", REACH SVHC="No SVHC", RMS Current (Irms)=25A, RoHS Compliant=Yes, Series=XAL7070, Shielding=Shielded, Termination=SMD/SMT, Tolerance=20%, Width=7.7mm
Q1 Q2: "N-CHANNEL 40-V (D-S) MOSFET", Manufacturer_Name=Vishay, Copyright="Copyright (C) 2025 Ultra Librarian. All rights reserved.", Manufacturer_Part_Number=SIR426DP-T1-GE3, RefDes=RefDes, TYPE=Type
R1 R7: library part CMP-2000-02426-2, "100kΩ ±0.5% 0.0625W 1/16W Chip Resistor 0603 (1608 Metric) Thin Film", Case Code (Imperial)=0603, Case Code (Metric)=1608, Max Operating Temperature=125°C, Max Power Dissipation=63mW, Min Operating Temperature=-55°C, Package Quantity=1, Resistance=100kR, Resistance Tolerance=0.5%, Resistor Type="Thin Film", Temperature Coefficient=25ppm/°C, Voltage Rating=75V, Case/Package=0603, Depth=0.8mm, Height=0.4mm, Lead Free="Lead Free", Length=1.6mm, Number of Pins=2, Number of Terminations=2, Packaging="Tape and Reel", Power Rating=63mW, RoHS Compliant=Yes, Series=RR, Technology="THIN FILM", Termination=SMD/SMT, Tolerance=0.5%, Voltage Rating (DC)=75V, Width=0.8mm, Working Voltage=75V
R2: library part CMP-2001-00582-2, "Metal Film Chip Resistor, High Reliability Type, 0.125 W, +/- 0.1%, -55 to 155 degC, 0805 (2012 Metric), RoHS, Tape and Reel", Case Code - in=0805, Case Code - mm=2012, Manufacturer=Panasonic, Operating Temperature Range=-55Cto+155C, Package / Case=0805(2012metric), Package Description="2-Pin Surface Mount Device, Body 2 x 1.25 mm", Power Rating=125mW(1/8W), Resistance=10kOhms, Temperature Coefficient=25PPM/C, Tolerance=0.1%, Voltage Rating=100V, Brand=Panasonic, Datasheet URL=https://industrial.panasonic.com/cdbs/www-data/pdf/RDM0000/AOA0000C307.pdf, Datasheet Version=02/2016, Factory Pack Quantity=5000, Height=0.5mm, Length=2mm, Manufacturer URL=http://www.panasonic.com/, Mounting Technology=SurfaceMount, Package Reference=0805, Packaging=Reel, Product=ThinFilmResistorsSMD, Product Category=ThinFilmResistors-SMD, RoHS=Details, Series=ERA-6A, Termination Style=SMD/SMT, TYPE=MetalFilmChipResistors, Width=1.25mm
R5: library part CMP-2000-02416-2, "100Ω ±0.5% 0.0625W 1/16W Chip Resistor 0603 (1608 Metric) Thin Film", Case Code (Imperial)=0603, Case Code (Metric)=1608, Max Operating Temperature=125°C, Max Power Dissipation=63mW, Min Operating Temperature=-55°C, Package Quantity=1, Resistance=100R, Resistance Tolerance=0.5%, Resistor Type="Thin Film", Temperature Coefficient=25ppm/°C, Voltage Rating=75V, Case/Package=0603, Depth=0.8mm, Height=0.4mm, Lead Free="Lead Free", Length=1.6mm, Number of Pins=2, Number of Terminations=2, Packaging="Cut Tape", Power Rating=63mW, RoHS Compliant=Yes, Series=RR, Size Code=0603, Technology="THIN FILM", Termination=SMD/SMT, Tolerance=0.5%, Voltage Rating (DC)=75V, Weight=7.1E-05oz, Width=0.031inch
R6: library part CMP-26527-002316-1, "10Ω ±5% 1W 2512 Thick Film Chip Resistor AEC-Q200 compliant", Case Code (Imperial)=2512, Case Code (Metric)=6432, Max Operating Temperature=155°C, Max Power Dissipation=1W, Min Operating Temperature=-55°C, Resistance=10R, Resistor Type="Thick Film", Temperature Coefficient=200ppm/°C, Tolerance=5%, Case/Package=2512, Construction=Rectangular, Contact Plating=Tin, Depth=3.2mm, Features="Automotive AEC-Q200", Height=0.028inch, Lead Free="Lead Free", Length=0.248inch, Military Standard=Not, Mount="Surface Mount", Number of Terminations=2, Packaging="Tape and Reel", Power Rating=1W, Radiation Hardening=No, RoHS Compliant=Yes, Series=RMCF, Size Code=2512, Width=0.126inch
R8 R9: library part CMP-05422-000141-1, "RES SMD 9.31KOHM 0.1% 1/10W 0603", Case Code (Imperial)=0603, Case Code (Metric)=1608, Max Operating Temperature=155°C, Max Power Dissipation=100mW, Min Operating Temperature=-55°C, Package Quantity=1, Ratings=AEC-Q200, Resistance=9.31kR, Resistance Tolerance=0.1%, Resistor Type="Thin Film", Temperature Coefficient=25ppm/°C, Voltage Rating=75V, Case/Package=0603, Construction=Rectangular, Contact Plating=Tin, Depth=0.8mm, Features="Automotive AEC-Q200", Height=0.45mm, Lead Free="Lead Free", Length=1.6mm, Military Standard=Not, Mount="Surface Mount", Number of Pins=2, Number of Terminations=2, Packaging="Tape and Reel", Power Rating=100mW, Radiation Hardening=No, REACH SVHC="No SVHC", Series=ERA, Technology="METAL FILM", Termination=SMD/SMT, Tolerance=0.1%, Voltage Rating (DC)=75V, Weight=7.1E-05oz, Width=0.8mm
R10: library part CMP-1012-00809-1, "442K 0.1W 1% 0603 (1608 Metric)  SMD", Case-EIA=0603, Case-Metric=1608, Power="0.1 W", Tolerance="1 %", Technology=SMT
R11: library part CMP-26527-006700-1, "2Ω ±5% 1W 2512 Thick Film Chip Resistor AEC-Q200 compliant", Case Code (Imperial)=2512, Case Code (Metric)=6432, Max Operating Temperature=155°C, Max Power Dissipation=1W, Min Operating Temperature=-55°C, Resistance=2R, Resistor Type="Thick Film", Temperature Coefficient=400ppm/°C, Tolerance=5%, Case/Package=2512, Construction=Rectangular, Contact Plating=Tin, Depth=3.2mm, Features="Automotive AEC-Q200", Height=0.028inch, Lead Free="Lead Free", Length=0.248inch, Military Standard=Not, Mount="Surface Mount", Number of Terminations=2, Packaging="Tape and Reel", Power Rating=1W, Radiation Hardening=No, RoHS Compliant=Yes, Series=RMCF, Size Code=2512, Width=0.126inch
R13 R14: library part CMP-2000-05022-1, "Resistor, 10 KOhm, +/- 5%, 100 mW, -55 to 155 degC, 0603 (1608 Metric), RoHS, Tape and Reel", Case Code - in=0603, Case Code - mm=1608, Manufacturer=Yageo, Operating Temperature Range=-55Cto+155C, Package Description="2-Pin Surface Mount Device, Body 1.6 x 0.8 mm", Package Reference=603, Power Rating=100mW, Resistance=10kOhms, Temperature Coefficient=100PPM/C, Tolerance=5%, Voltage Rating=50V, Datasheet URL=http://www.farnell.com/datasheets/443971.pdf, Datasheet Version="Rev. 4, 04/2009", Manufacturer URL=http://www.yageo.com/, Packaging=Reel, Product=ThickFilmResistorsGeneralPurpose, Series=RC, Termination Style=SMD/SMT
Rbb: library part CMP-1010-00642-1, "10K 0.05W 1% 0201 (0603 Metric)  SMD", Case-EIA=0201, Case-Metric=0603, Power="0.05 W", Tolerance="1 %", Technology=SMT
Rft: library part CMP-2001-00287-1, Manufacturer=Panasonic, Part Number=ERJ-6ENF7322V
Rmode: library part CMP-2002-00086-1, Manufacturer="Vishay Dale", Part Number=CRCW040252K3FKED
Rpg: library part CMP-2002-08123-3, "RES Thick Film, 100kΩ, 1%, 0.063W, 100ppm/°C, 0402", Case Code (Imperial)=0402, Case Code (Metric)=1005, Max Operating Temperature=155°C, Max Power Dissipation=63mW, Min Operating Temperature=-55°C, Package Quantity=10000, Resistance=100kR, Temperature Coefficient=100ppm/°C, Tolerance=1%, Voltage Rating=50V, Case/Package=0402, Composition="Thick Film", Contact Plating=Tin, Depth=0.5mm, Features="Automotive AEC-Q200", Height=0.35mm, Lead Free="Lead Free", Length=1mm, Military Standard=Not, Mount="Surface Mount", Number of Pins=2, Number of Terminations=2, Packaging="Tape and Reel", Power Rating=63mW, Radiation Hardening=No, Termination=SMD/SMT, Voltage Rating (DC)=50V, Weight=2.3E-05oz, Width=0.02inch
Rsr: library part CMP-2000-07418-1, "Chip Resistor, 10 mOhm, +/- 1%, 0.5 W, -65 to 170 degC, 2010 (5025 Metric), RoHS, Tape and Reel", Case Code - in=2010, Case Code - mm=5025, Case Height=0.635mm, Case Length=5mm, Case Width=2.5mm, Manufacturer=Vishay, Operating Temperature Range=-65Cto+170C, Package / Case=2010(5025metric), Package Description="2-Pin Surface Mount Device, Body 5.08 x 2.54 mm", Power Rating=500mW(1/2W), Resistance=0.01Ohms, Temperature Coefficient=75PPM/C, Tolerance=1%, Brand=Vishay/Dale, Datasheet URL=http://www.vishay.com/docs/30100/wsl.pdf, Datasheet Version=07/2016, Factory Pack Quantity=4000, Manufacturer URL=http://www.vishay.com/, Mounting Technology=SurfaceMount, Package Reference=2010, Packaging=Reel, Product=MetalElementCurrentSensingResistors, Product Category=CurrentSenseResistors-SMD, RoHS=Details, Series=WSL, Termination Style=SMD/SMT, Tradename=PowerMetalStrip, TYPE=PowerMetalStripResistors,LowValue(downto0.0005Ohms),SurfaceMount, Unit Weight=0.001372oz
U1: library part CMP-0321-00211-3, "IC SYNC SW-MODE BAT CHRGR 16VQFN", Case/Package=VQFN, Max Charge Current=10A, Max Operating Temperature=85°C, Max Supply Voltage=28V, Min Input Voltage=5V, Min Operating Temperature=-40°C, Operating Supply Current=1mA, Package Quantity=1, Switching Frequency=1.2MHz, Contact Plating=Gold, Lead Free="Lead Free", Min Supply Voltage=5V, Number of Cells=123456, Number of Pins=16, Output Current=10A, Packaging="Tape and Reel", Radiation Hardening=No, REACH SVHC="No SVHC", RoHS Compliant=Yes, Series=-

## Free pads (board coordinates)
  round 280 hole 250: 5(240,4720) 5(272.29,254.02) 5(6555,250) 5(6660,4725)
  round 60 hole 30: 6(1602.29,1419.02) 7(2535,1010) 8(3955,975) 9(4630,970)

## Via types
v1: diameter 50, hole 28, Top Layer to Bottom Layer, 53 vias
v2: diameter 23.62, hole 11.81, Top Layer to Bottom Layer, 4 vias

## Nets (pads, with @x,y where several pads share a name; then routed paths per layer and width w, separated by ;. In a path a pad name is that pad's centre, name@x,y a point inside that pad or via, vN(x,y) a via of type N, cw(c..) or ccw(c..) an arc to the next point about the centre after c; other vN are vias at no path point)
GND: "14V Buck.9" "Cin 10uF.2" "Cout 2.2" "Cout 22uF.2" Battery.1 C2.2 C5.2 C7.2 C8.1 C9.1 C12.2@2527.29,1999.06 C13.2 Cin2.2 Cinx.2 IN.2 IN.3 J1.2 J1.3 J2.2 J2.3 pad.5@240,4720 pad.5@6555,250 pad.5@6660,4725 Q2.1 Q2.2 Q2.3 U1.11 U1.17 | length 707.1
  Top Layer w10: C9.1@1102.48,2476.06 1112.25,2485.83 C9.1 ; 1147.29,1989.02 1147.29,1973.7 1181.97,1939.02 C7.2 ; U1.17@1700,1930 U1.17@1719.68,1910.32 ; U1.17@1726.03,1919.33 U1.11 1859.56,1919.33 1894.25,1954.02 2012.29,1954.02 2052.29,1914.02 2137.29,1914.02 2162.29,1939.02
  other v1: 3646.17,419.51 3726.17,419.51 3646.17,509.51 3726.17,509.51 3806.17,509.51 2941.17,549.51 3036.17,549.51 3646.17,604.51 2941.17,639.51 3036.17,639.51 2352.29,2124.02 2427.29,2134.02 2517.29,2134.02 502.29,2189.02 402.29,2194.02 2357.29,2234.02 2427.29,2239.02 2517.29,2239.02 502.29,2284.02 587.29,2284.02 402.29,2289.02 587.29,2369.02 402.29,2374.02 502.29,2374.02 2330,4215 1645,4250 1950,4250 2330,4570 1960,4575 1645,4590
  other v2: 1696.5,1889.8 1735.87,1889.8 1696.5,1929.17 1735.87,1929.17
"Net14V Buck_2": "14V Buck.2" Cff2.1 Rbb.2 Rft.1 | length 248.8
  Top Layer w10: Rft.1 3259.66,468.5 Cff2.1 3259.66,589.41 3290.89,620.65 3293.53,620.65 Rbb.2 ; Rbb.2@3296.49,624.51 3296.49,694.51
"Net14V Buck_4": "14V Buck.4" Rpg.1 | length 114.7
  Top Layer w10: 3335.86,694.51 3335.86,687.77 3349.12,674.51 3390.55,674.51 3396.41,668.65 3396.41,650.1 3406.87,639.64 3406.87,639.55 3411.09,635.34 Rpg.1
"Net14V Buck_5": "14V Buck.5" Css.1 | length 137.6
  Top Layer w10: 3356.14,712.49 3458.18,712.49 3466.17,704.51 Css.1
"Net14V Buck_6": "14V Buck.6" Cboot.2 L2.1 | length 266.7
  Top Layer w10: Cboot.2 3431.17,1114.51 3466.17,1149.51 3565.31,1149.51 3571.17,1143.65 3571.17,1134.51 ; L2.1@3571.17,949.91 L2.1@3578.67,942.41
"Net14V Buck_7": "14V Buck.7" Cboot.1 | length 176.9
  Top Layer w10: 3358.79,783.76 3420.42,783.76 3431.17,794.51 Cboot.1@3431.17,894.55
"Net14V Buck_8": "14V Buck.8" "Cin 10uF.1" Battery.4 C11.2 C12.1@2527.29,1878.98 C13.1 Cff.1 Cin2.1 Cinx.1 pad.7 R2.2 Rsr.2 U1.9 | length 684
  Top Layer w10: U1.9 1799.85,1879.96 1805.79,1874.02 2297.29,1874.02 ; R2.2 2196.74,1433.94 2359.11,1433.94
"Net14V Buck_10": "14V Buck.10" Rmode.2 | length 71.8
  Top Layer w10: Rmode.2 3221.17,695.21 3238.97,713 3245.7,713
NetBattery_2: Battery.2 Battery.3
NetBattery_5: Battery.5 Battery.6
NetBattery_7: Battery.7 Battery.8
NetC2_1: C2.1 R11.1 | length 177.5
  Top Layer w10: C2.1 937.29,2632.99 R11.1 ; R11.1@977.29,2792.84 R11.1@983.96,2799.51
NetC4_1: C4.1 R7.2 R9.1 U1.2 U1.6 | length 992.4
  Top Layer w10: v1(1477.29,1894.02) 1502.04,1918.76 1646.72,1918.76 U1.2 ; U1.6 1706.34,1778.89 1671.46,1744.02 v1(1667.29,1744.02) 1731.38,1679.92 R9.1 1741.37,1629 R7.2 1832.76,1618.53 1832.76,1478.43 C4.1@1802.29,1447.95
  Bottom Layer w10: v1(1477.29,1894.02) 1627.29,1744.02 v1(1667.29,1744.02)
NetC5_1: C5.1 D1.2 U1.12 | length 354.6
  Top Layer w10: U1.12 1852.29,1939.02 1893.39,1980.12 D1.2 2121.66,1980.12 C5.1
NetC6_1: C6.1 D1.1 U1.16 | length 470.8
  Top Layer w10: v1(1657.29,2069.02) 1657.29,2022.52 1686.66,1993.15 ; v1(1847.29,2024.02) 1854.94,2031.67 1876.99,2031.67 1914.34,2069.02 C6.1 1917.84,2068.46 2001.74,2068.46 D1.1
  Bottom Layer w10: v1(1657.29,2069.02) 1682.29,2069.02 1727.29,2024.02 v1(1847.29,2024.02)
NetC6_2: C6.2 L1.1 Q1.1 Q1.2 Q1.3 Q2.5 Q2.6 Q2.7 Q2.8 U1.14 | length 306.2
  Top Layer w10: U1.14 1726.03,1993.15 1726.03,2097.76 1817.29,2189.02 ; C6.2 1917.29,2174.02
NetC7_1: C7.1 R6.1 U1.1 | length 421.1
  Top Layer w10: C7.1 1415.91,1939.02 ; R6.1 1415.91,2060.4 1415.91,1939.02 ; U1.1 1415.91,1939.02
NetC8_2: C8.2 C9.2 D2.1 Q1.5 Q1.6 Q1.7 Q1.8 R6.2 | length 41.7
  Top Layer w10: 1382.78,2489.02 D2.1@1412.29,2518.52
NetC10_2: C10.2 C11.1 L1.2 Rsr.1 U1.10 | length 1136.5
  Top Layer w10: U1.10 1861.09,1899.65 1880.46,1919.02 v1(1967.29,1919.02) ; v1(2377.29,2399.02) 2417.29,2439.02 2417.29,2509.02
  Bottom Layer w10: v1(1967.29,1919.02) 2257.29,1919.02 2292.29,1954.02 2292.29,2314.02 v1(2377.29,2399.02)
NetC12_2: C12.2@1392.29,1493.54 R5.2 U1.4 | length 558.7
  Top Layer w10: C12.2@1392.29,1493.54 1394.26,1493.54 1429.3,1528.58 1472.29,1528.58 1472.29,1739.02 1612.29,1879.02 1632.15,1879.02 1633.1,1879.96 U1.4 ; 1472.29,1619.02 R5.2
NetCff2_2: "Cout 2.1" "Cout 22uF.1" Cff2.2 F1.1 L2.2 pad.8 Rft.2 | length 1034.7
  Top Layer w10: Cff2.2 3350.08,545.6 3351.17,544.51 3351.17,469.51 ; Rft.2 3321.68,469.51 3351.17,469.51 ; v1(3461.17,469.51) 3351.17,469.51
  Bottom Layer w10: v1(3461.17,469.51) 3463.52,467.16 3923.82,467.16 3956.17,499.51 v1(3956.17,764.51)
NetCff_2: Cff.2 R1.2 R2.1 U1.8 | length 826.5
  Top Layer w10: U1.8 1985.95,1830.35 1992.29,1824.02 Cff.2@1992.29,1684.02 ; Cff.2 1990.44,1545.87 2002.29,1534.02 R1.2 ; R1.2@2019.06,1465.92 2002.29,1449.15 R1.2 ; R2.1 R1.2@2019.49,1429.02 ; R1.2 2002.29,1435.91 2009.18,1429.02 R1.2@2019.49,1429.02 ; R1.2 R1.2@2019.49,1429.02
NetD3_1: D3.1 U1.3 | length 1947.7
  Top Layer w10: v1(1207.29,1734.02) 1392.29,1734.02 1552.29,1894.02 1625.94,1894.02 1631.57,1899.65 U1.3 ; D3.1 v1(1577.29,789.02)
  Bottom Layer w10: v1(1207.29,1734.02) 1207.29,804.87 1223.15,789.02 v1(1577.29,789.02)
NetD3_2: D3.2 R13.2 | length 79.1
  Top Layer w10: R13.2 D3.2
NetD4_1: D4.1 U1.5 | length 1319
  Top Layer w10: v1(1552.29,1739.02) 1559.49,1746.22 1592.29,1746.22 U1.5 ; D4.1 v1(1682.29,789.02)
  Bottom Layer w10: v1(1552.29,1739.02) 1552.29,919.02 v1(1682.29,789.02)
NetD4_2: D4.2 R14.2 | length 81.2
  Top Layer w10: D4.2 1682.29,493.54 R14.2
NetF1_2: F1.2 J1.1 J2.1 pad.9
NetQ1_4: Q1.4 U1.15 | length 1211.6
  Top Layer w10: U1.15 1706.34,2143.07 v1(1707.29,2144.02) ; Q1.4@1792.29,2564.02 1810.29,2564.02 1817.29,2571.02 1817.29,2759.02 v1(1877.29,2819.02)
  Bottom Layer w10: v1(1707.29,2144.02) 1877.29,2314.02 v1(1877.29,2819.02)
NetQ2_4: Q2.4 U1.13 | length 951.1
  Top Layer w10: U1.13 1745.71,2047.44 v1(1792.29,2094.02) ; Q2.4 v1(2242.29,2354.02)
  Bottom Layer w10: v1(1792.29,2094.02) 2227.29,2094.02 2242.29,2109.02 v1(2242.29,2354.02)
NetR5_1: pad.6 R5.1 R9.2 R10.2 | length 558.9
  Top Layer w10: pad.6 1653.94,1419.02 1654.11,1418.85 1687.29,1418.85 ; R9.2 R5.1 1581.66,1494.02 1692.74,1494.02 1687.29,1488.56 1687.29,1418.85 ; R10.2 1687.29,1418.85
NetR7_1: R7.1 R8.2 U1.7 | length 509.6
  Top Layer w10: U1.7 1726.03,1769.32 1752.29,1743.06 1752.29,1739.02 1777.29,1739.02 1802.59,1713.72 1805.51,1713.72 1822.29,1696.94 R7.1 1886.43,1694.02 1892.29,1688.16 R8.2
SGND: "14V Buck.3" C4.2 C10.1 C12.1@1392.29,1434.49 Css.2 R1.1 R8.1 R10.1 Rbb.1 Rmode.1 Rpg.2 | length 728.4
  Top Layer w10: v1(1387.29,1289.02) v1@1392.29,1294.02 ; v1@1387.29,1299.02 v1@1392.29,1294.02 ; C12.1@1387.29,1429.49 C12.1@1392.29,1434.49 ; v1@1394.79,1291.52 v1@1392.29,1294.02 ; R10.1@1684.79,1291.52 R10.1 ; C10.1 v1(2877.29,2784.02) ; v1(3181.17,539.51) 3221.17,579.51 Rmode.1 ; 3316.17,694.51 3316.25,694.43 3316.25,663.21 3324.95,654.51 ; Rbb.1 3324.95,654.51 ; Css.2 3518.41,648.76 3526.17,641 v1(3526.17,579.51) ; v1@3532.74,579.51 v1(3526.17,579.51) ; 3324.95,654.51 3348.81,654.51 3395.43,607.89 3406.95,607.89 Rpg.2 3414.64,603.67 3415.47,604.51 3494.6,604.51 3519.6,579.51 v1(3526.17,579.51)
  other v1: 1792.29,1264.02 1882.29,1264.02 1482.29,1289.02
Wall+: D2.2 IN.1 R11.2 R13.1 R14.1 | length 3963.5
  Top Layer w10: 272.29,2939.02 247.29,2914.02 247.29,430.35 253.15,424.49 R13.1 1582.29,429.49 R14.1
pads on no net: "14V Buck.1" Battery.9 Battery.10 Battery.11 Battery.12 Battery.13 Battery.14 Battery.15 Battery.16

## Polygon pours and split planes (outlines as drawn)
GND on Top Layer "GND_L01_P022" (solid, pour order 22): 5.21,4930 6960.21,4930 6960.21,0 6930.21,30 5.21,30
"Net14V Buck_8" on Top Layer "NET14V_BUCK_8_L01_P019" (solid, pour order 19): 2702.29,2709.02 2702.29,1909.02 2692.29,1899.02 2287.29,1899.02 2287.29,1819.02 2347.29,1819.02 2347.29,1509.02 3380,1509.02 3380,2709.02
"Net14V Buck_8" on Top Layer "NET14V_BUCK_8_L01_P009" (solid, pour order 9): 2320.48,779.15 2451.53,779.15 3322.09,779.15 3322.09,1509.02 2320.48,1509.02
GND on Top Layer "GND_L01_P012" (solid, pour order 12): 287.29,2559.02 312.29,2559.02 1164.46,2559.02 1163.05,2557.6 1163.05,1957.94 303.36,1957.94 287.29,1974.02
NetC6_2 on Top Layer "NETC6_2_L01_P014" (solid, pour order 14): 1752.29,2526.02 1927.29,2526.02 1927.29,2274.02 1927.29,2164.02 1752.29,2164.02
Wall+ on Top Layer "WALL+_L01_P021" (solid, pour order 21): 1285,2910.03 1285,2893.97 1285,2745 1525,2745 1540,2760 1540,2910.03
GND on Top Layer "GND_L01_P020" (solid, remove dead copper, pour order 20): 1422.5,4900 1422.5,3840 5097.5,3840 5097.5,4900
NetC10_2 on Top Layer "NETC10_2_L01_P017" (solid, pour order 17): 2252.29,2494.02 2687.29,2494.02 2687.29,2824.02 2267.29,2824.02 2252.29,2809.02
GND on Top Layer "GND_L01_P016" (solid, pour order 16): 2087.29,2316.35 2087.29,2034.02 2152.29,2034.02 2152.29,1934.02 2257.29,1934.02 2599.89,1934.02 2604.89,2289.02 2217.29,2289.02 2192.29,2314.02
SGND on Top Layer "SGND_L01_P018" (solid, pour order 18): 1297.29,1454.02 1497.29,1454.02 1497.29,1429.02 1612.29,1314.02 1762.48,1314.02 1762.48,1414.02 1847.29,1414.02 2037.6,1414.02 2037.29,1413.7 2037.29,1204.02 1307.29,1204.02 1297.29,1214.02
NetC6_2 on Top Layer "NETC6_2_L01_P015" (solid, pour order 15): 1839.79,2526.02 1987.29,2673.52 1987.29,2799.02 2202.29,2799.02 2202.29,2439.02 1927.29,2439.02 1927.29,2526.02
Wall+ on Top Layer "WALL+_L01_P011" (solid, pour order 11): 254.98,3719.09 254.98,2929.09 284.98,2899.09 1584.98,2899.09 1584.98,3699.09 1534.98,3749.09 259.98,3749.09
NetC8_2 on Top Layer "NETC8_2_L01_P013" (solid, pour order 13): 1192.29,2209.02 1627.29,2209.02 1617.29,2219.02 1617.29,2619.02 1192.29,2619.02
GND on Top Layer "GND_L01_P002" (solid, pour order 2): 3590.4,669.51 5141.17,669.51 5141.17,209.51 4405.4,209.51 2430.4,209.51 2430.4,764.51 2435.4,764.51 2990.4,764.51 3006.17,764.51 3020.4,764.51 3200.46,764.51 3091.17,424.51 3590.4,424.51 3590.4,594.51
NetCff2_2 on Top Layer "NETCFF2_2_L01_P010" (solid, pour order 10): 3696.17,1164.51 3696.17,714.51 4206.17,714.51 4206.17,1164.51
GND on Top Layer "GND_L01_P000" (solid, pour order 0): 3276.17,764.51 3291.17,749.51 3316.17,749.51 3316.17,729.51 3196.17,729.51 3191.17,734.51 3191.17,764.51
"Net14V Buck_6" on Top Layer "NET14V_BUCK_6_L01_P001" (solid, pour order 1): 3301.17,771.05 3301.17,760.51 3327.18,760.51 3337.87,751.21 3551.17,751.21 3551.17,771.05
NetF1_2 on Top Layer "NETF1_2_L01_P006" (solid, remove dead copper, pour order 6): 4221.17,1154.51 4996.17,1154.51 4996.17,709.51 4221.17,709.51
GND on Top Layer "GND_L01_P007" (solid, pour order 7): 4526.17,669.51 4526.17,754.51 4646.17,754.51 4646.17,669.51
GND on Top Layer "GND_L01_P008" (solid, pour order 8): 5011.17,669.51 5011.17,744.51 5141.17,744.51 5141.17,669.51
GND on Bottom Layer "GND_L04_P023" (solid, pour order 23): 0,4912.16 0,35 35,0 6970,0 6970,4937.25
GND on PGND (split plane): 6944.9,20.1 20.1,20.1 20.1,4914.9 6944.9,4914.9
SGND on AGND (split plane): 6944.9,20.1 20.1,20.1 20.1,4914.9 6944.9,4914.9

## Other copper
Top Layer:
  rectangle net GND: 320,2550 500,2765
  rectangle net NetBattery_2: 3165,2805 3390,3790
  rectangle net NetBattery_7: 6010,3490 6275,4535
  rectangle net NetBattery_5: 5980,1975 6315,3065
  rectangle net Wall+: 535,2590 720,2905
  rectangle net "Net14V Buck_6": 3535,750 3631.17,1133.62

## Silkscreen, mask and mechanical layers (free items; w line width, h text height)
Top Overlay:
  lines w3.3: 110,4060 1310,4060 1310,4360 110,4360 110,4060
  text "HARD RADAR DETECTOR" at 457.29,184.02 h60
Mechanical 1:
  circle w0: c272.29,5009.02 r125

## Text inside footprints (layer, text, board x,y; h text height)
Battery: Top 3D Body "*" at 3187.19,4404.53 h50; Top Overlay "*" at 3277.15,4476.03 h50